# Altium PCB timer.PcbDoc (part 1 of 2)
Units mm, origin at the board's own origin, x right, y up, seen from the top; angles counter-clockwise.
Board outline 100 x 100 mm, 4 copper layers (Top Layer, Int1 (GND), Int2 (PWR), Bottom Layer), stack 1.369 mm thick; 158 components, 108 nets, 457 pads, 145 vias.
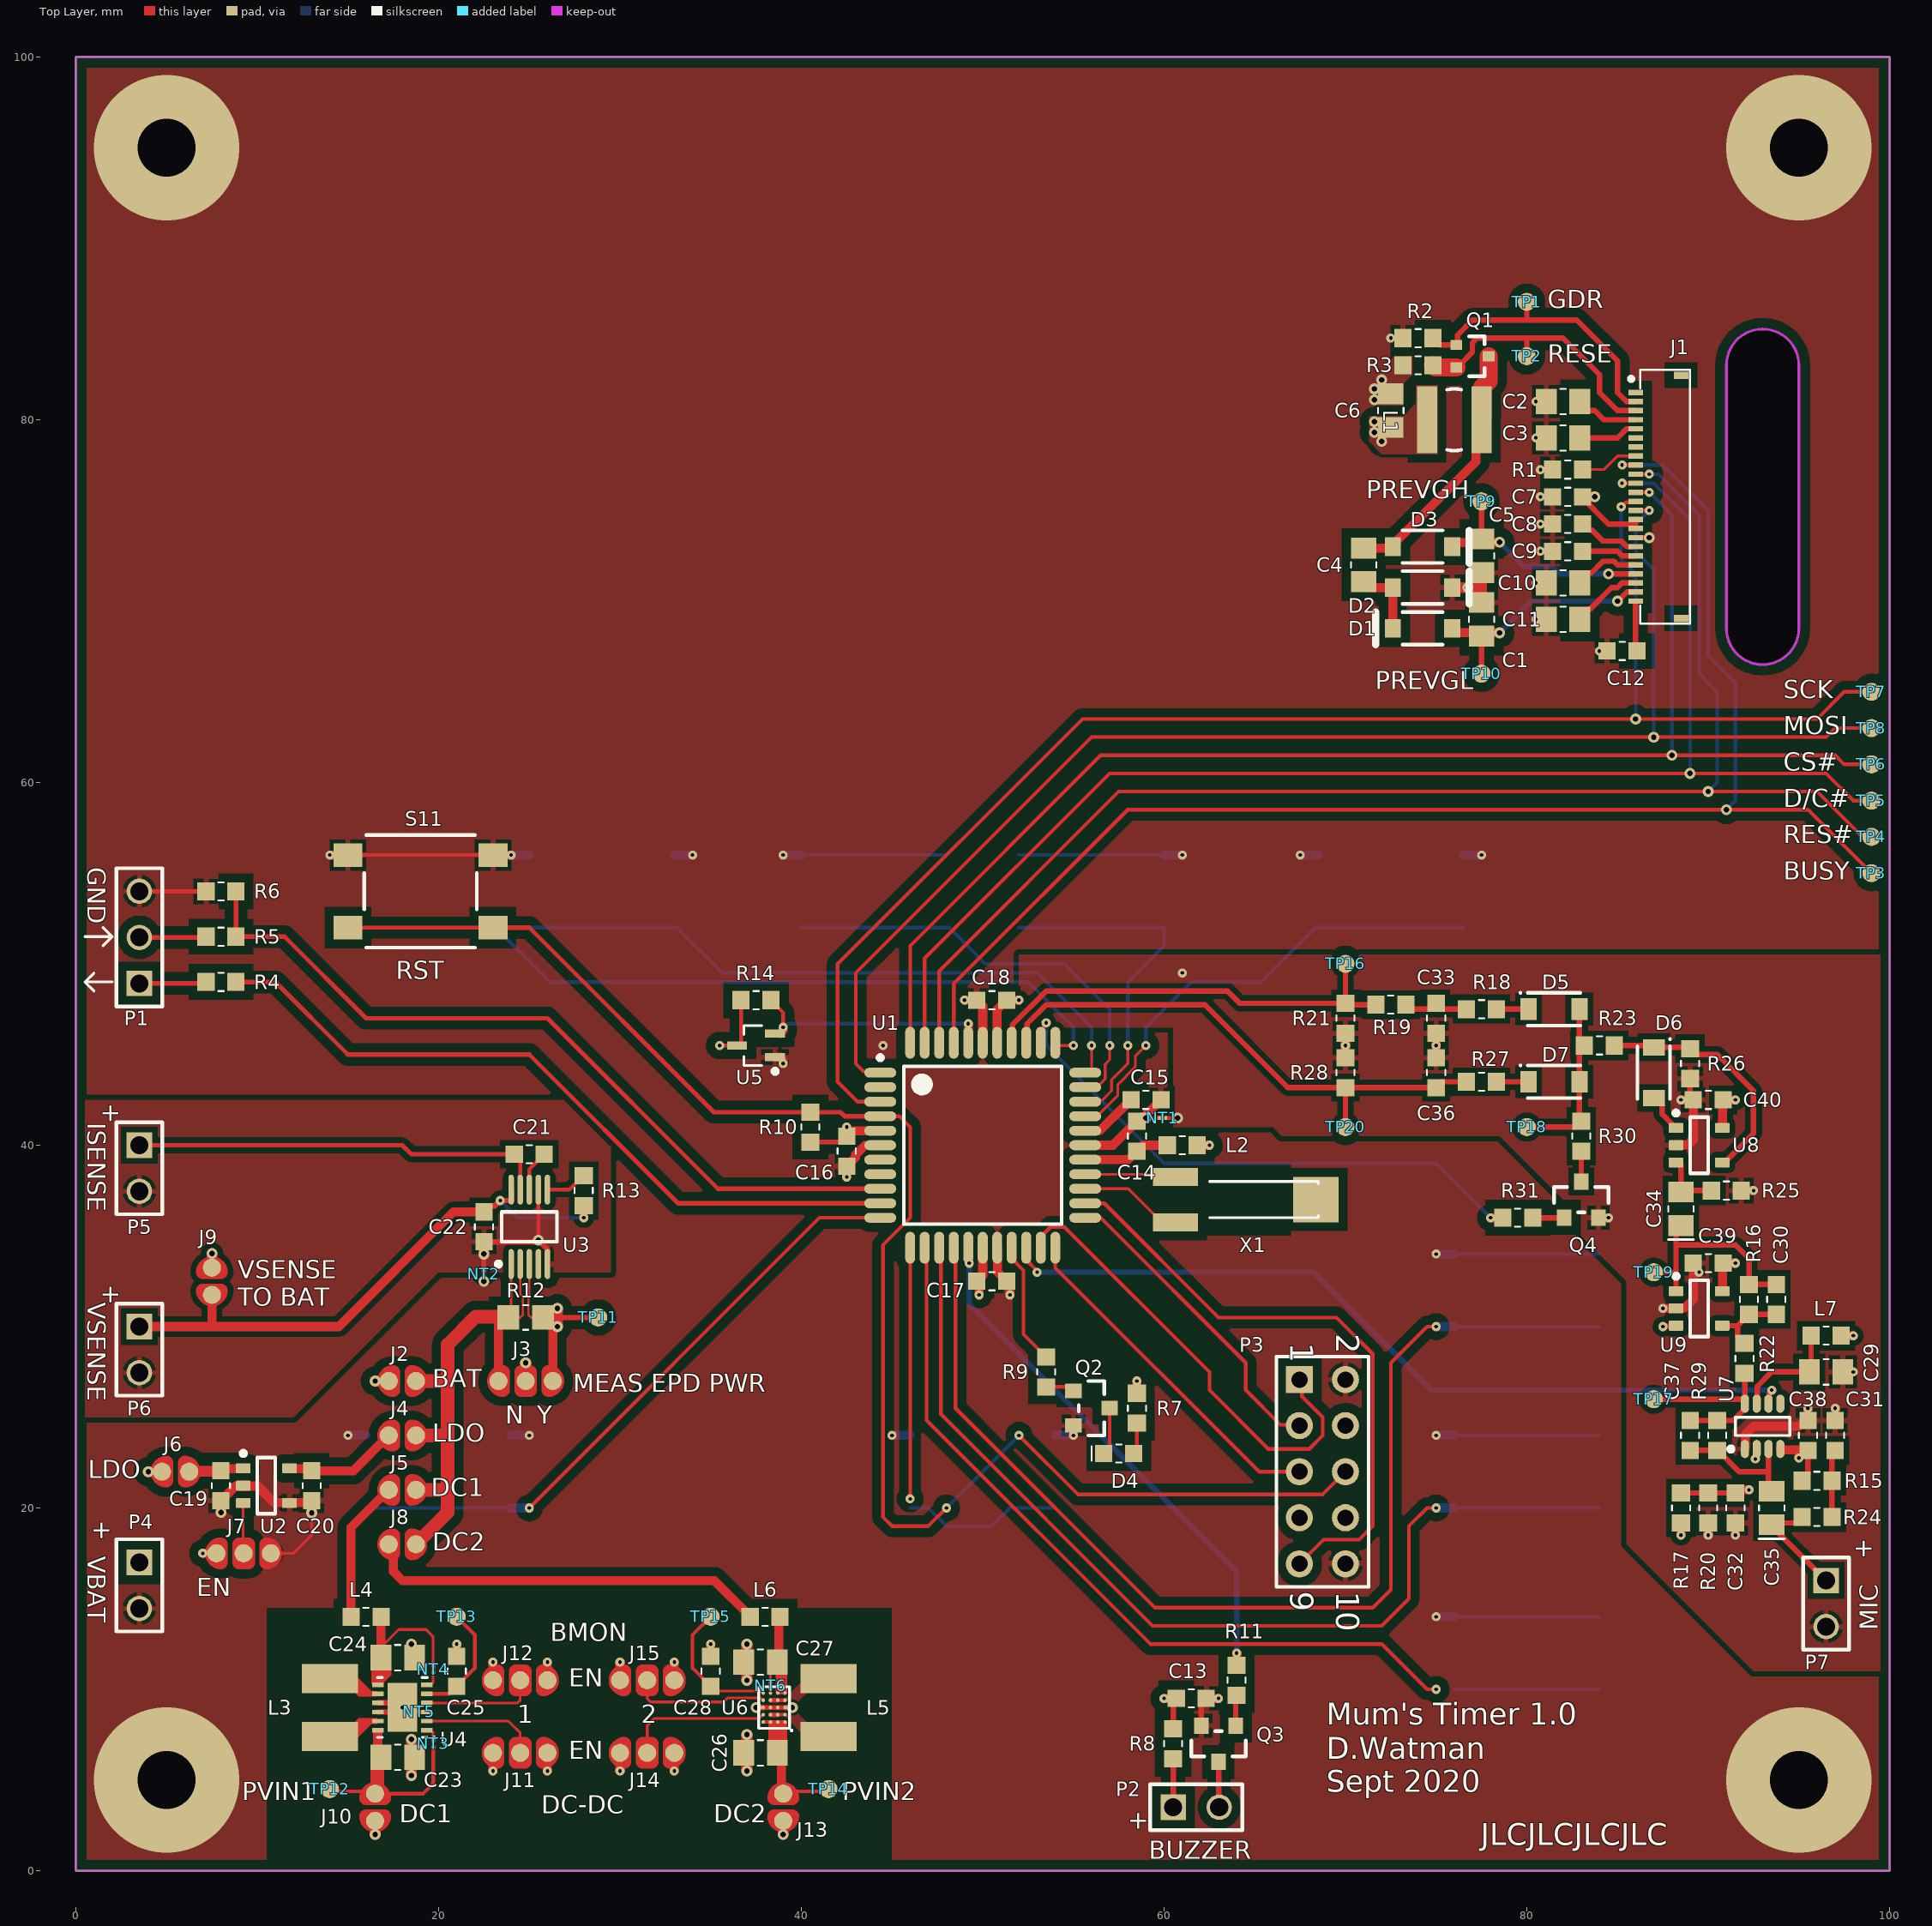
[diagram p0: Top Layer view]
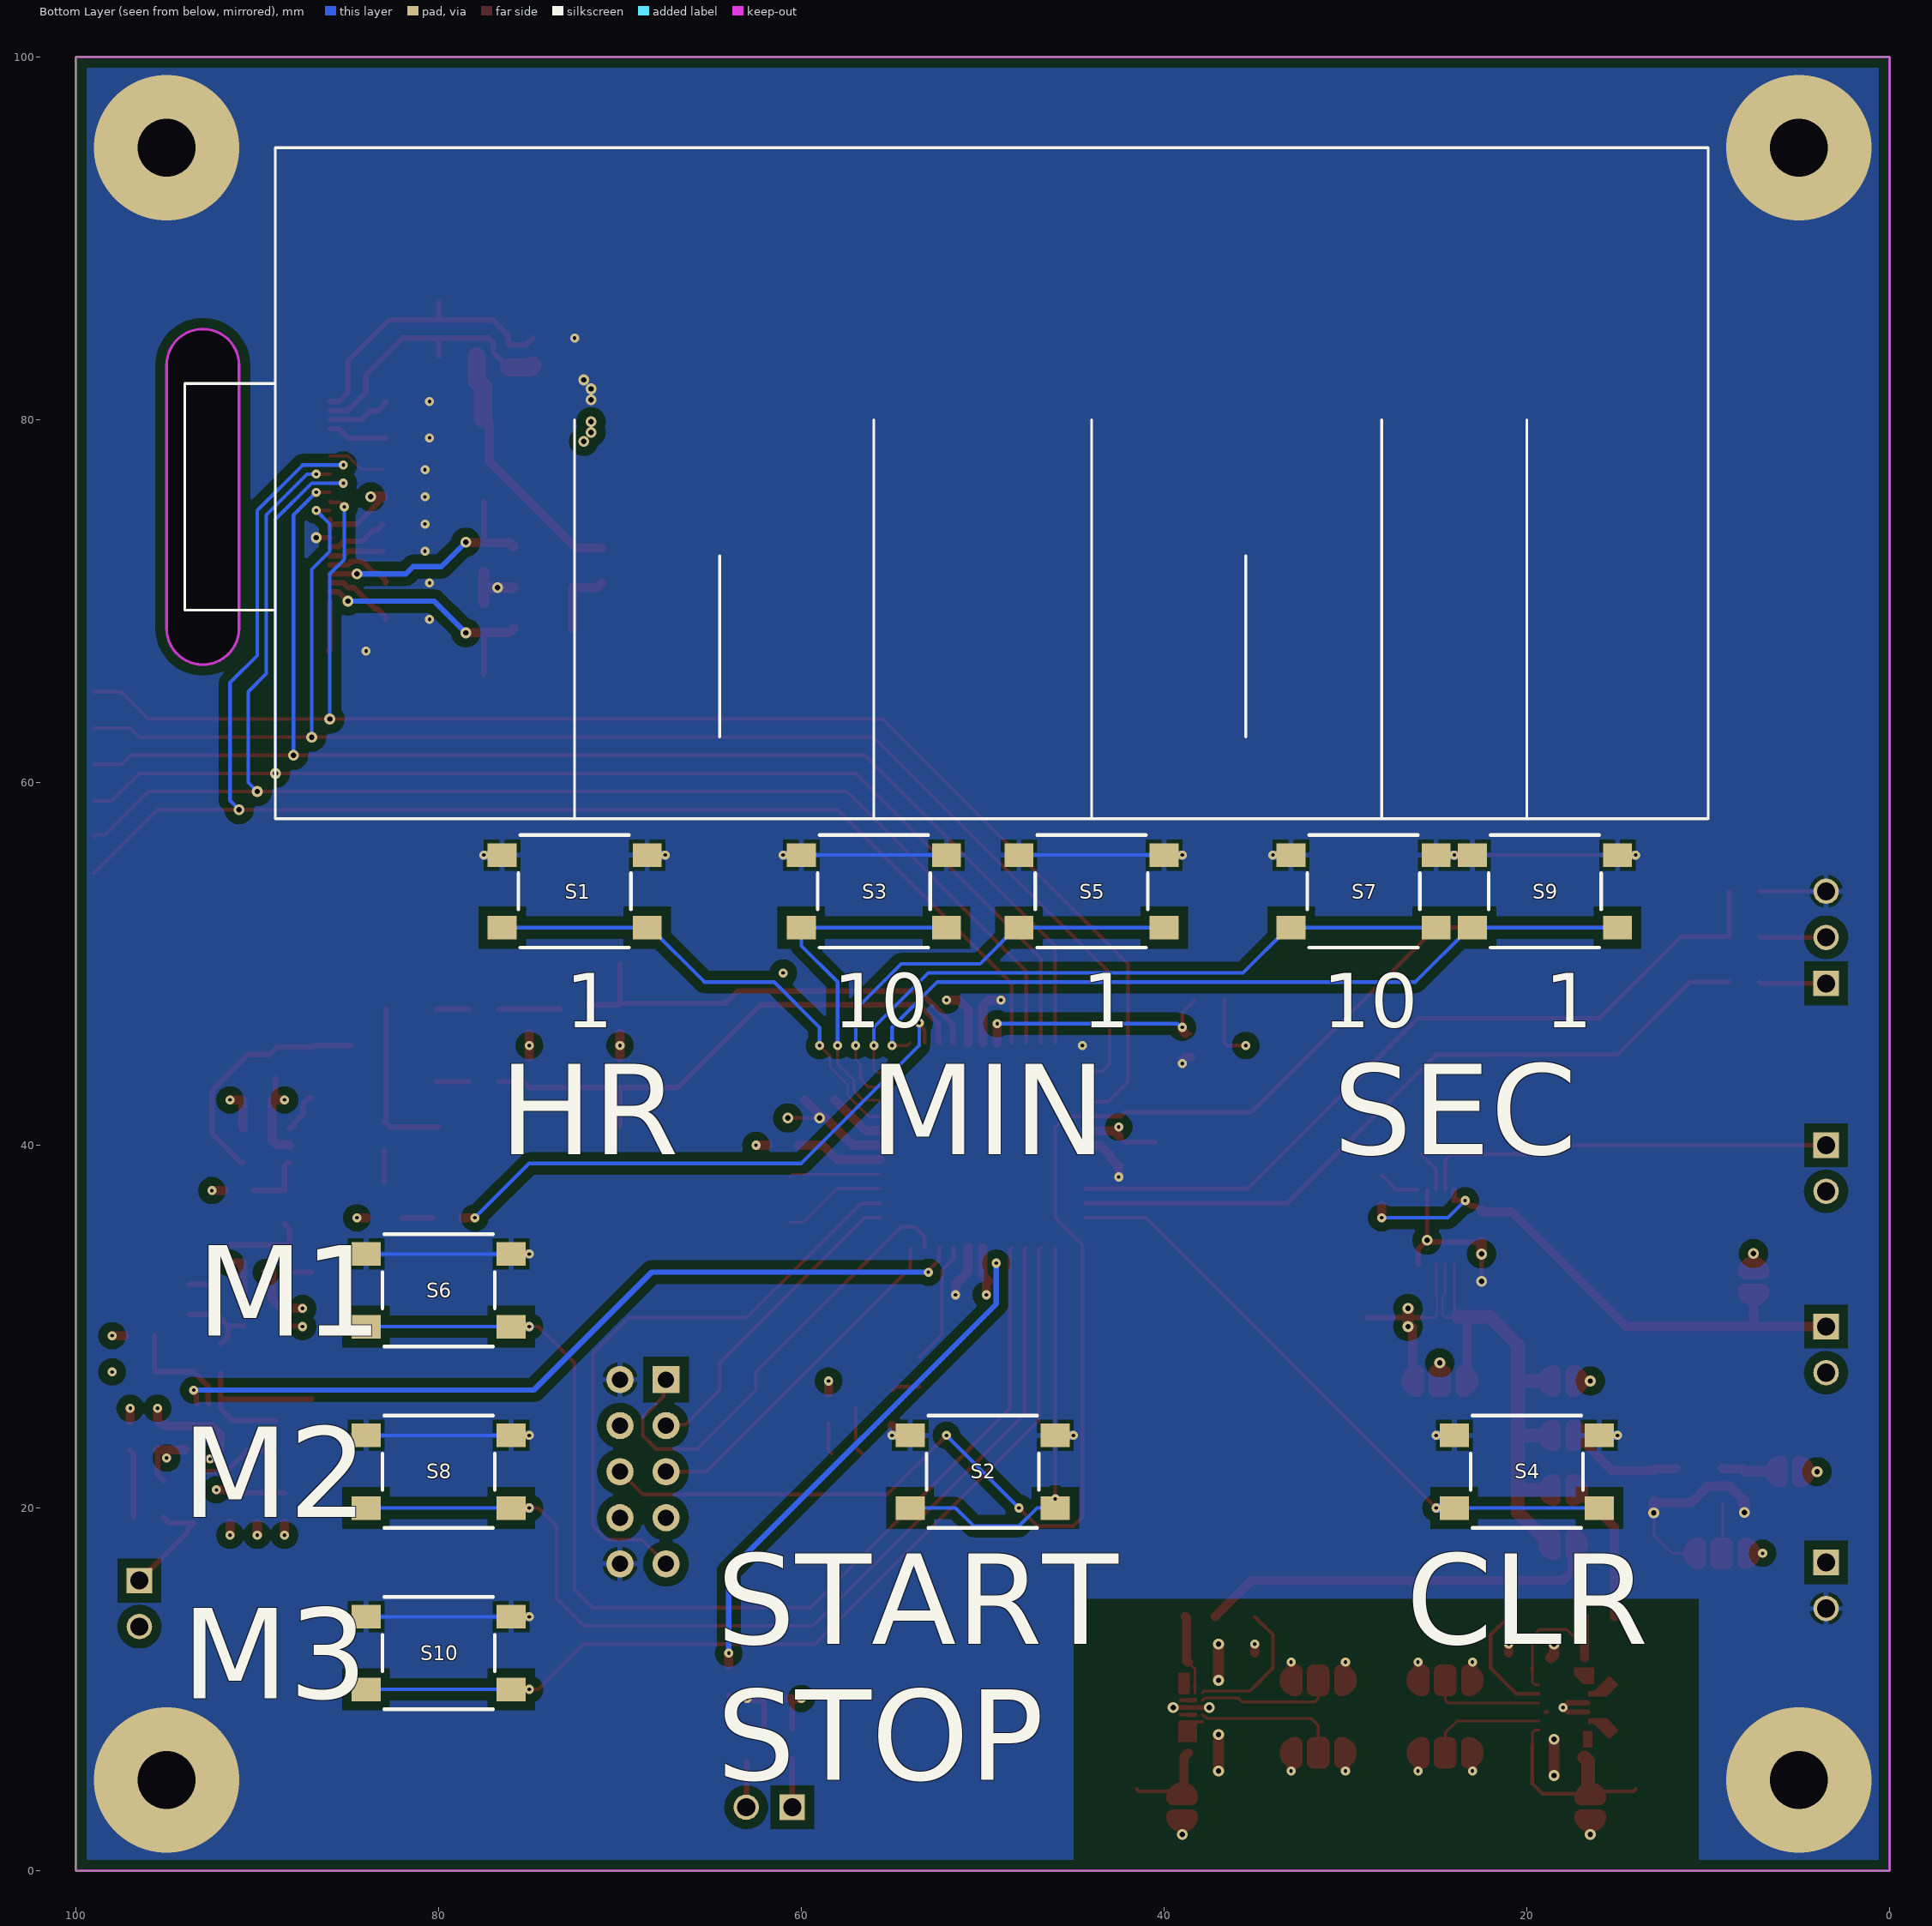
[diagram p1: Bottom Layer view, seen from below]
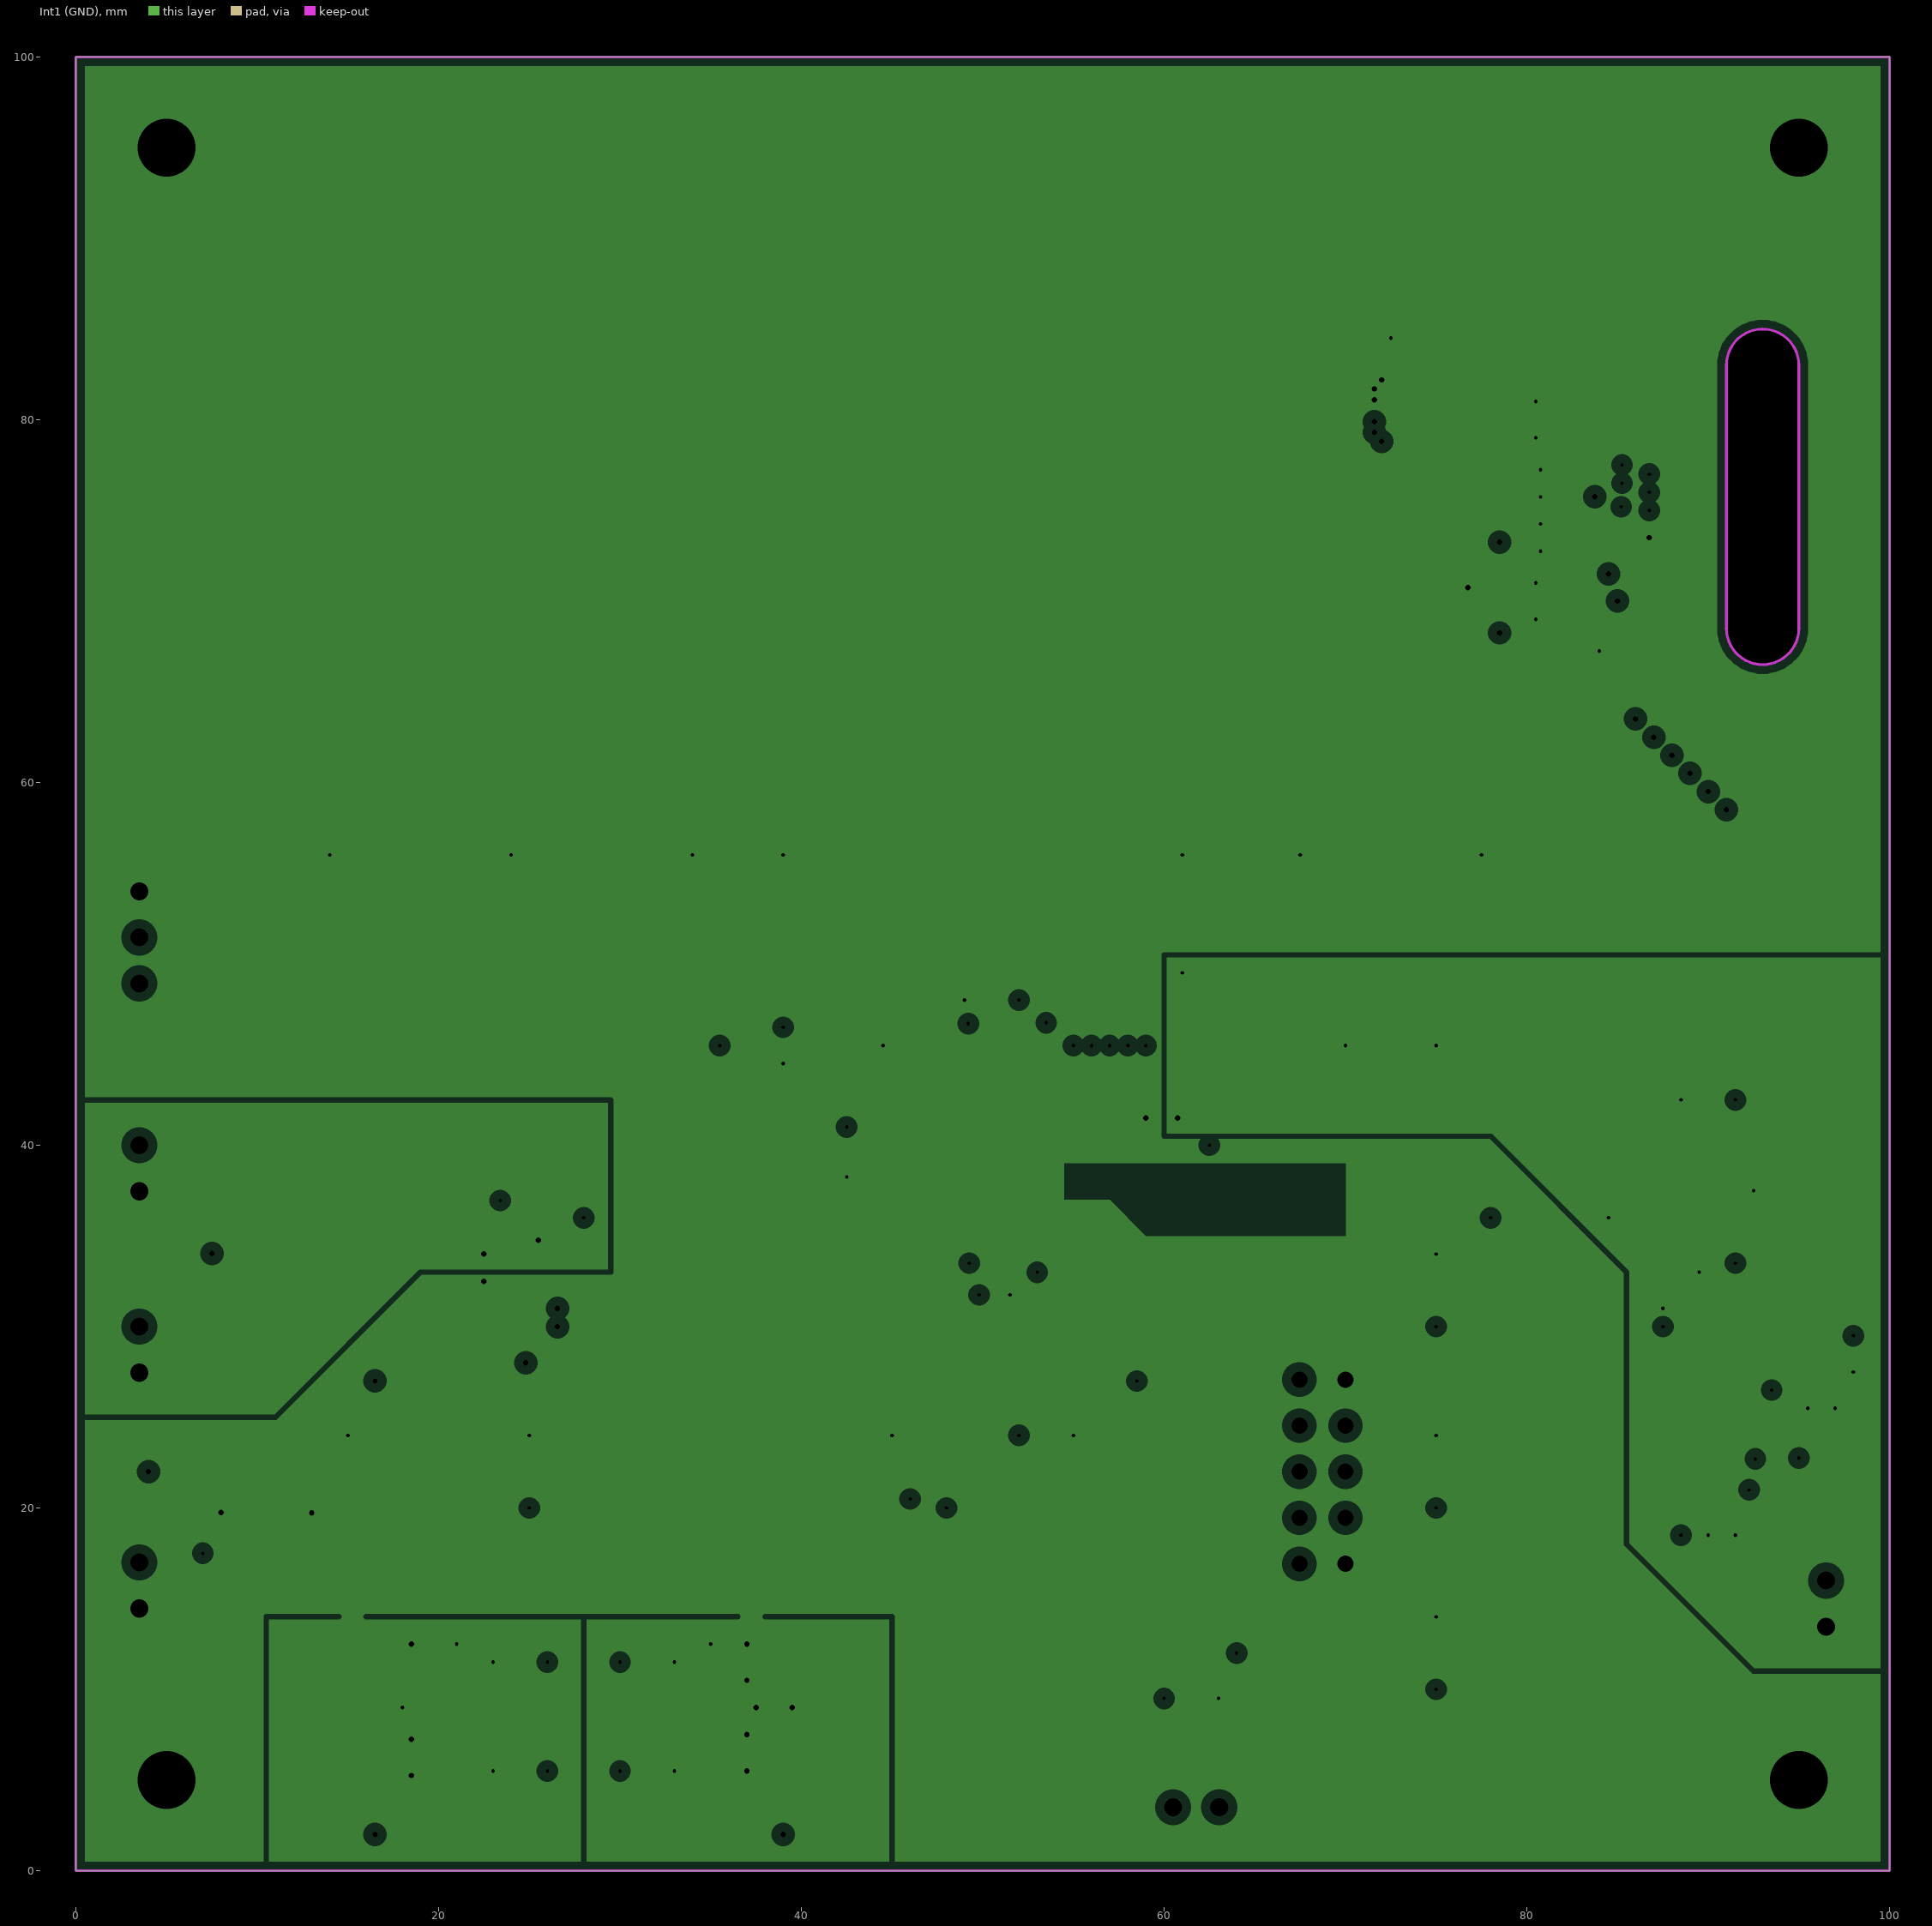
[diagram p2: Int1 (GND), clearances drawn from the general rule]
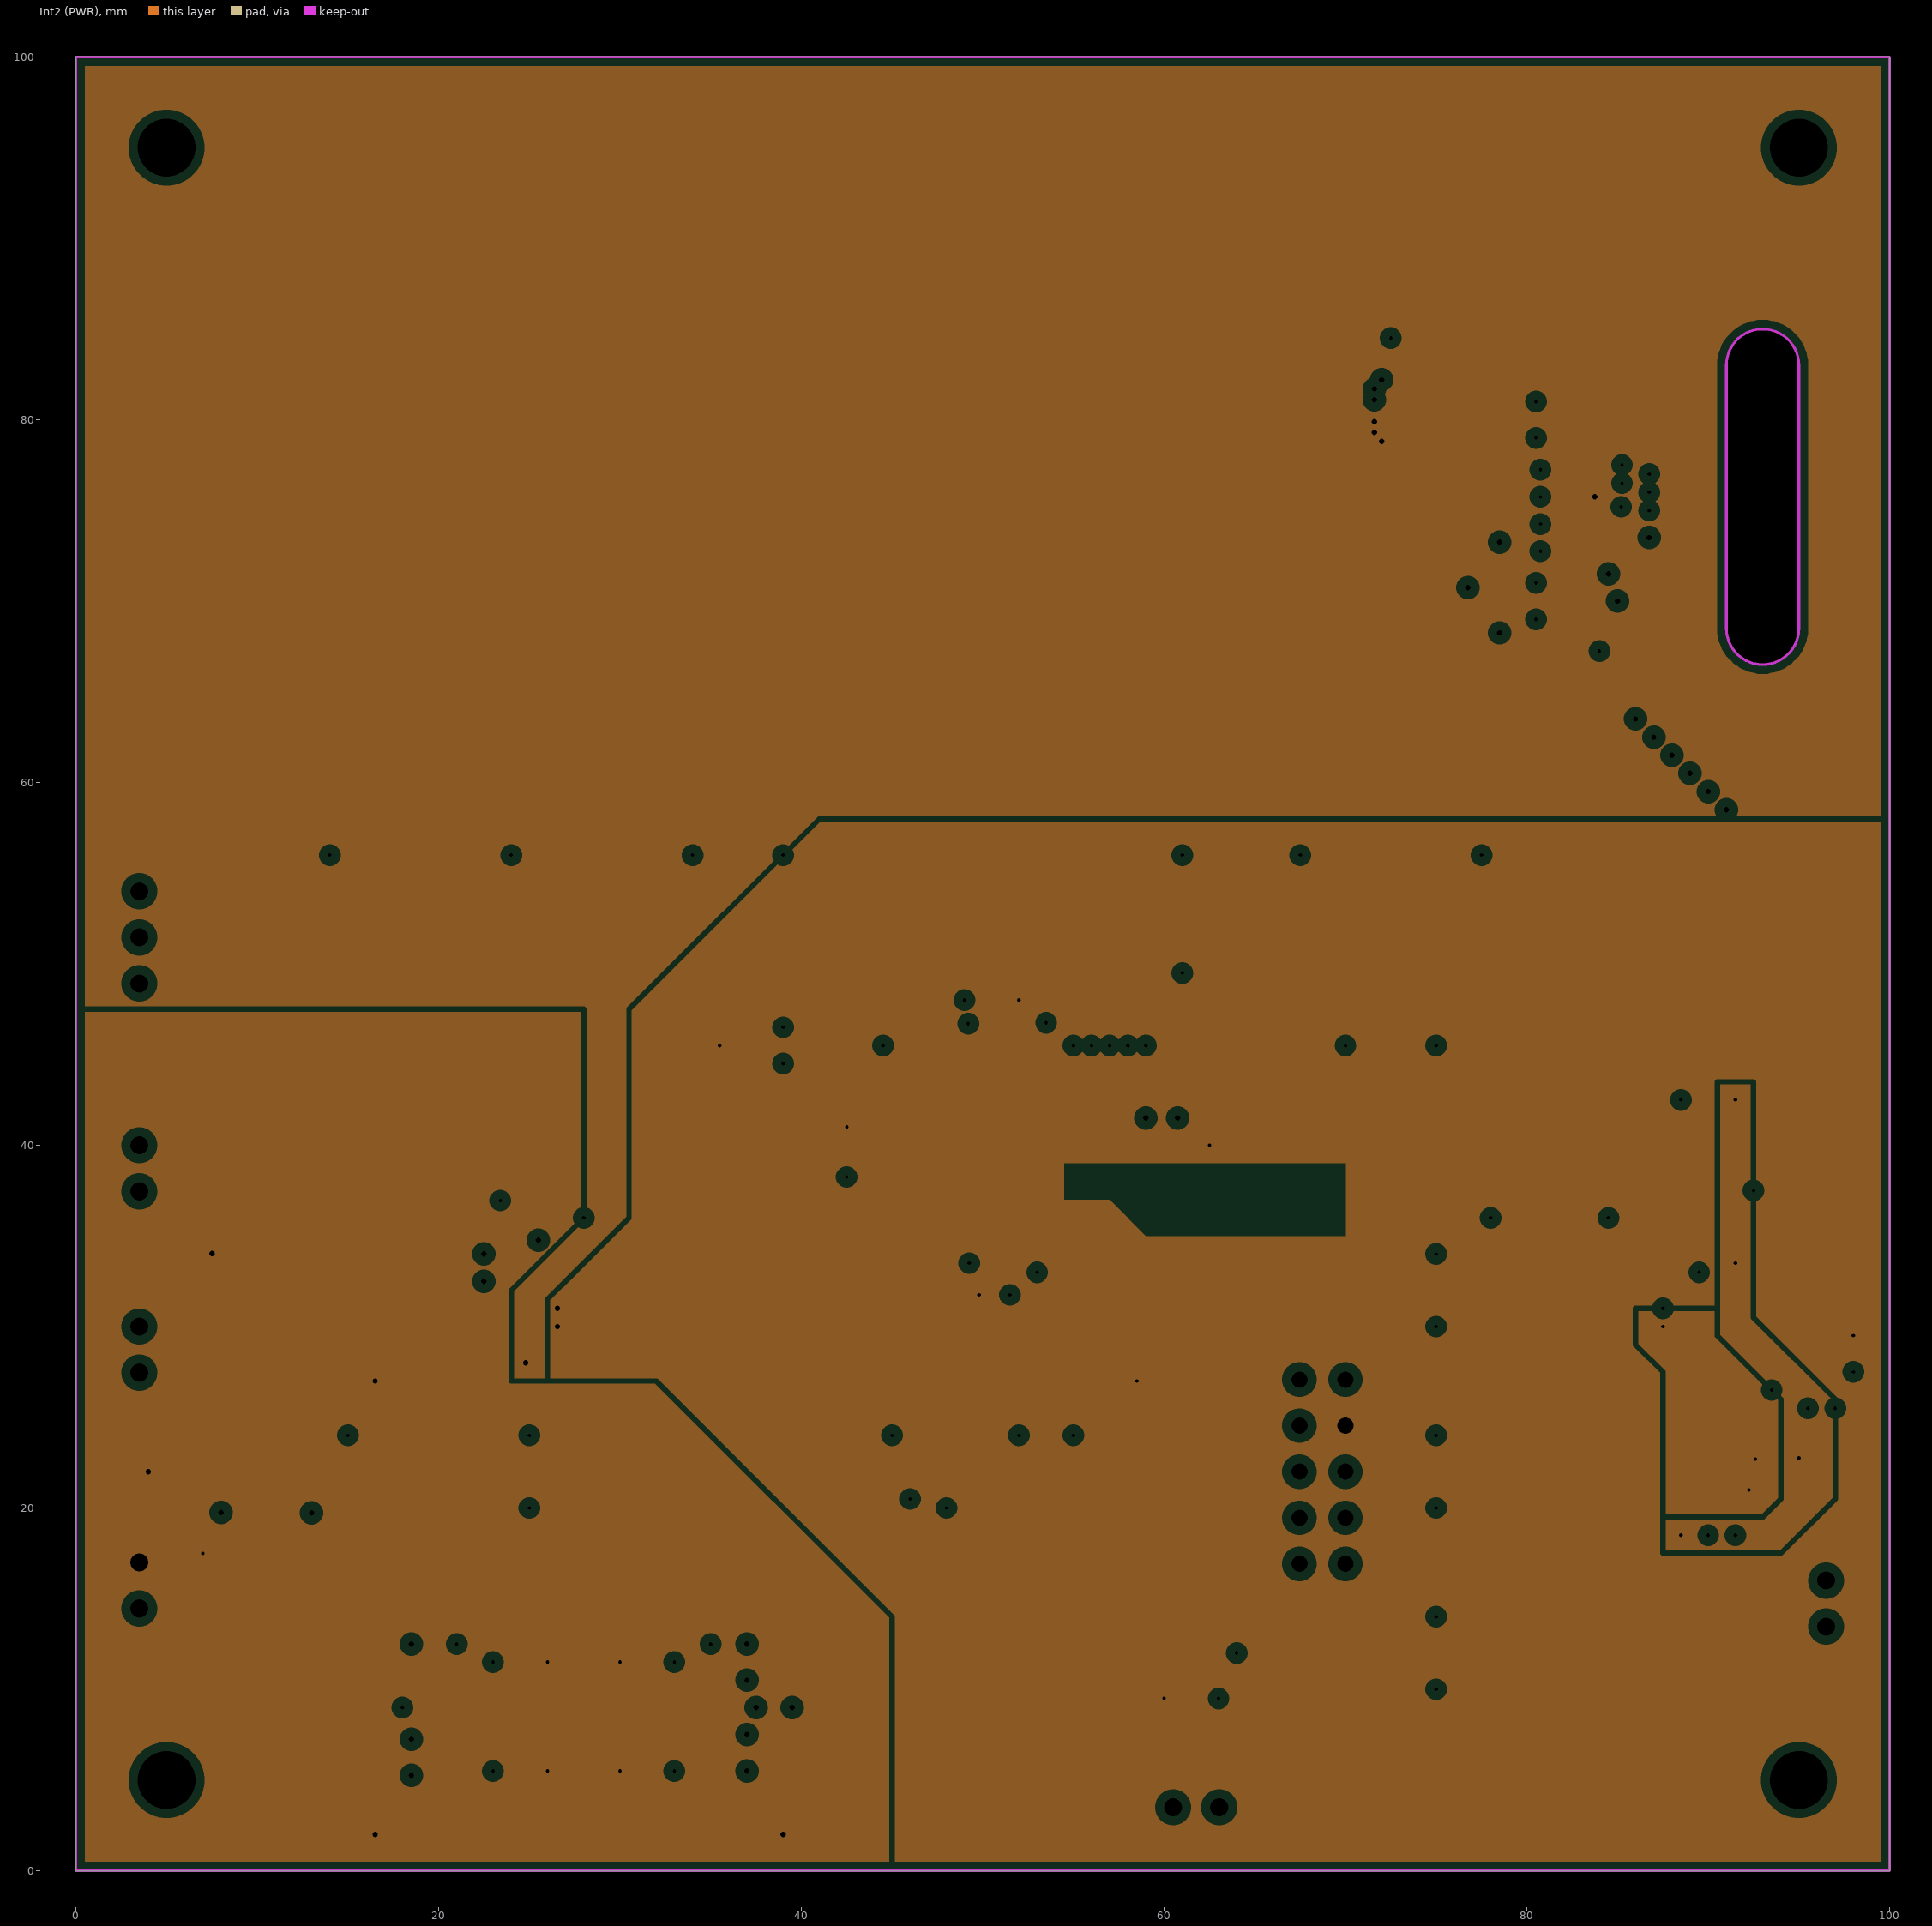
[diagram p3: Int2 (PWR), clearances drawn from the general rule]

## Layer stack, top to bottom
Top Solder: solder mask 0.0254, SM-001, Dk 4
Top Layer: signal copper 0.035
Dielectric 1: prepreg 0.1295, PP-017, Dk 4.3
Dielectric 2: prepreg 0.1295, PP-017, Dk 4.3
Int1 (GND): plane copper 0.035, net (Multiple Nets)
Dielectric 3: core 0.7112, Core-039, Dk 4.8
Int2 (PWR): plane copper 0.035, net (Multiple Nets)
Dielectric 4: prepreg 0.1295, PP-017, Dk 4.3
Dielectric 5: prepreg 0.1295, PP-017, Dk 4.3
Bottom Layer: signal copper 0.035
Bottom Solder: solder mask 0.0254, SM-001, Dk 4

## Board outline
0,0 0,100 100,100 100,0
cut-out: 91,68.5 ccw(c93,68.5) 95,68.5 95,83 ccw(c93,83) 91,83

## Design rules (kind name [scope] priority, off if disabled: settings)
AssemblyTestPointUsage [All] p1 off:
AssemblyTestpoint [All] p1 off: testpointundercomponent=TRUE minsize=1.016 maxsize=2.54 preferedsize=1.524 minholesize=0 maxholesize=1.016 preferedholesize=0.813 testpointgrid=0.025 usegrid=TRUE gridtolerance=0 allowsidetop=TRUE allowsidebottom=TRUE
Clearance Clearance_connect [InNamedPolygon('INDCON1') or InNamedPolygon('INDCON2')  or InNamedPolygon('EPD_BOOST_VCC')  or InNamedPolygon('EPD_BOOST_GND')] p1: gap=0.3 ignorepadtopadclearanceinfootprint=FALSE except(0.15: Arc-Fill Arc-Poly Arc-Region Track-Fill Track-Poly Track-Region SMDPad-Fill SMDPad-Poly SMDPad-Region THPad-Fill THPad-Poly THPad-Region Via-Fill Via-Poly Via-Region Fill-Fill Fill-Poly Fill-Region Poly-Poly Poly-Region Region-Region)
Clearance Clearance_shield [InNamedPolygon('ISENSE_AGND') or InNamedPolygon('MIC_SGND')] p2: gap=0.3 ignorepadtopadclearanceinfootprint=FALSE
Clearance Clearance_InnerLayers [OnInverted vs OnInverted] p3 off: gap=0.15 ignorepadtopadclearanceinfootprint=FALSE except(0.3: Fill-Fill Fill-Poly Fill-Region Poly-Poly Poly-Region Region-Region; 0.5: Arc-Fill Arc-Poly Arc-Region Track-Fill Track-Poly Track-Region SMDPad-Fill SMDPad-Poly SMDPad-Region THPad-Fill THPad-Poly THPad-Region Via-Fill Via-Poly Via-Region)
Clearance Clearance_fill [InNamedPolygon('TOP_GND_FILL') or InNamedPolygon('BTM_GND_FILL')] p4: gap=0.5 ignorepadtopadclearanceinfootprint=FALSE
Clearance [All] p5: gap=0.15 ignorepadtopadclearanceinfootprint=FALSE
ComponentClearance [not IsNetTieComponent vs not IsNetTieComponent] p1: gap=0.2 collisioncheckmode=3 verticalgap=0.25 showdistances=FALSE
FabricationTestPointUsage [All] p1 off: valid=0 allowmultiple=FALSE
FabricationTestpoint [All] p1 off: side=3 testpointundercomponent=TRUE minsize=1.016 maxsize=2.54 preferedsize=1.524 minholesize=0 maxholesize=1.016 preferedholesize=0.813 testpointgrid=0.025 allowsidetop=TRUE allowsidebottom=TRUE usegrid=TRUE gridtolerance=0
HoleSize [All] p1: absolutevalues=TRUE maxlimit=6.3 minlimit=0.2 maxpercent=80.000 minpercent=20.000
HoleToHoleClearance [All] p1: gap=0.25 allowstackedmicrovias=TRUE
MinimumAnnularRing [All] p1: minimumring=0.13
MinimumSolderMaskSliver [All] p1 off: minsoldermaskwidth=0.2
PlaneClearance [All] p1: clearance=0.5
PlaneConnect PlaneConnect_PWR [(InNet('GND') or InNet('AGND') or InNet('SGND') or InNet('VBAT') or InNet('VCC') or InNet('VCC_EPD'))  and (AsMM(HoleDiameter) = 0.3)] p1: pad.planeconnectstyle=Relief pad.reliefexpansion=0.3 pad.reliefentries=4 pad.reliefconductorwidth=0.3 pad.reliefairgap=0.2 via.planeconnectstyle=Direct via.reliefexpansion=0.508 via.reliefentries=4 via.reliefconductorwidth=0.254 via.reliefairgap=0.254
PlaneConnect PlaneConnect_PAD [InAnyComponent] p2: pad.planeconnectstyle=Relief pad.reliefexpansion=0.3 pad.reliefentries=4 pad.reliefconductorwidth=0.3 pad.reliefairgap=0.2 via.planeconnectstyle=Direct via.reliefexpansion=0.508 via.reliefentries=4 via.reliefconductorwidth=0.254 via.reliefairgap=0.254
PlaneConnect [All] p3: planeconnectstyle=Relief reliefexpansion=0.3 reliefentries=4 reliefconductorwidth=0.3 reliefairgap=0.2
PolygonConnect PolygonConnect_direct [All vs IsNamedPolygon('INDCON1') or IsNamedPolygon('INDCON2')  or IsNamedPolygon('EPD_BOOST_VCC')  or IsNamedPolygon('EPD_BOOST_GND')] p1: connectstyle=Direct reliefconductorwidth=0.25 reliefentries=4 polygonreliefangle="90 Angle" airgapwidth=0.2
PolygonConnect PolygonConnect_BigHoles [All vs (AsMM(HoleSize) >= 2)] p2 off: connectstyle=Direct reliefconductorwidth=0.25 reliefentries=4 polygonreliefangle="90 Angle" airgapwidth=0.2
PolygonConnect [All] p3: thpad.connectstyle=Relief thpad.reliefconductorwidth=0.3 thpad.reliefentries=4 thpad.polygonreliefangle="90 Angle" thpad.airgapwidth=0.2 smdpad.connectstyle=Relief smdpad.reliefconductorwidth=0.3 smdpad.reliefentries=4 smdpad.polygonreliefangle="90 Angle" smdpad.airgapwidth=0.2 via.connectstyle=Direct via.reliefconductorwidth=0.508 via.reliefentries=4 via.polygonreliefangle="90 Angle" via.airgapwidth=0.254
RoutingVias [All] p1: holewidth=0.3 width=0.6 viastyle="Through Hole" minholewidth=0.2 minwidth=0.45 maxholewidth=6.3 maxwidth=10
SilkToSilkClearance [All] p1 off: silktosilkclearance=0.2
SilkToSolderMaskClearance [IsPad] p1 off: minsilkscreentomaskgap=0.15 clearancetoexposedcopper=TRUE
SolderMaskExpansion [All] p1: expansion=0.05 istentingtop=FALSE
Width [All] p1: maxlimit=5 minlimit=0.127 preferedwidth=0.3
18 further rules are at their usual default settings.

## Classes and differential pairs
component class timer_mic: C13 C29 C31 C33 C35 C37 C39 D4 D6 L7 P7 Q3 R11 R16 R18 R26 R27 R28 R30 TP14 TP17 TP18 TP19 TP20 U7 U8 U9
component class timer_power: C17 C22 C26 C29 J2 J3 J4 J7 J8 J10 J12 J15 L3 L4 L6 NT3 NT5 NT6 P2 P5 R7 R8 R14 TP11 TP12 TP13 TP14 TP15 U2 U3 U4 U6
component class timer_main: C1 C2 C3 C4 C5 C6 C7 C8 C9 C10 C11 C12 C13 C14 C15 C17 D1 D2 D3 D4 J1 L1 L2 NT1 P1 Q1 Q3 R1 R2 R3 R4 R5 R7 R8 R9 R11 R14 S1 S2 S5 S6 S7 S10 S11 TP1 TP2 TP3 TP4 TP5 TP6 TP7 TP9 TP10 U1 X1

## Components (designator, comment, footprint, x,y, rotation, side; value= is the part's Value field where it differs from the comment)
C1 "CAP" C0805/2012 77.5,69 r270 top value=4.7uF
C2 "CAP" C0805/2012 82,81 r0 top value=4.7uF
C3 "CAP" C0805/2012 82,79 r0 top value=4.7uF
C4 "CAP" C0805/2012 71,72 r270 top value=4.7uF
C5 "CAP" C0805/2012 77.5,72.5 r270 top value=4.7uF
C6 "CAP" C0805/2012 72.5,80.5 r270 top value=4.7uF
C7 "CAP" C0603/1608 82.25,75.75 r0 top value=1uF
C8 "CAP" C0603/1608 82.25,74.25 r0 top value=1uF
C9 "CAP" C0603/1608 82.25,72.75 r0 top value=1uF
C10 "CAP" C0805/2012 82,71 r0 top value=4.7uF
C11 "CAP" C0805/2012 82,69 r0 top value=4.7uF
C12 "CAP" C0603/1608 85.25,67.25 r0 top value=1uF
C13 "CAP" C0603/1608 61.5,9.5 r180 top value=1uF
C14 "CAP" C0603/1608 58.5,40.5 r270 top value=1uF
C15 "CAP" C0603/1608 59,42.5 r180 top value=1uF
C16 "CAP" C0603/1608 42.5,39.675 r90 top value=1uF
C17 "CAP" C0603/1608 50.5,32.5 r180 top value=1uF
C18 "CAP" C0603/1608 50.5,48 r0 top value=1uF
C19 "CAP" C0603/1608 8,21.23 r90 top value=1uF
C20 "CAP" C0603/1608 13,21.23 r90 top value=1uF
C21 "CAP" C0603/1608 25,39.5 r180 top value=1nF
C22 "CAP" C0603/1608 22.5,35.5 r90 top value=1uF
C23 "CAP" C0805/2012 17.75,6.25 r180 top value=10uF
C24 "CAP" C0805/2012 17.75,11.75 r180 top value=22uF
C25 "CAP" C0603/1608 21,11 r270 top value=1uF
C26 "CAP" C0805/2012 37.75,6.5 r0 top value=10uF
C27 "CAP" C0805/2012 37.75,11.5 r0 top value=22uF
C28 "CAP" C0603/1608 35,11 r270 top value=1uF
C29 "CAP" C0805/2012 96.5,27.5 r180 top value=4.7uF
C30 "CAP" C0603/1608 93.75,31.5 r90 top value=47pF
C31 "CAP" C0603/1608 97,24 r270 top value=1uF
C32 "CAP" C0603/1608 91.5,20 r90 top value=1uF
C33 "CAP" C0603/1608 75,47 r90 top value=0.2uF
C34 "POLCAP" CP0805/2012 88.5,36.5 r90 top value=1uF
C35 "POLCAP" CP0805/2012 93.5,20 r90 top value=1uF
C36 "CAP" C0603/1608 75,44 r270 top value=1uF
C37 "CAP" C0603/1608 89,24 r270 top value=47pF
C38 "CAP" C0603/1608 95.5,24 r270 top value=1uF
C39 "CAP" C0603/1608 90,33.5 r0 top value=1uF
C40 "CAP" C0603/1608 90,42.5 r0 top value=1uF
D1 "MBR0530" FAIR-SOD123-2_V 74.25,68.5 r180 top
D2 "MBR0530" FAIR-SOD123-2_V 74.25,70.75 r0 top
D3 "MBR0530" FAIR-SOD123-2_V 74.25,73 r0 top
D4 "LED" 0603/1608_P 57.5,23 r180 top value=RED
D5 "DIODE_SCHOTTKY" SOD-123 81.5,47.5 r0 top value=xA
D6 "DIODE_SCHOTTKY" SOD-123 87,44 r270 top value=xA
D7 "DIODE_SCHOTTKY" SOD-123 81.5,43.5 r0 top value=xA
J1 "EPAPER_FMC" "FFC2B28-24-G REV" 86,75.75 r90 top locked
J2 "SEL2" JMP2 18,27 r0 top
J3 "SEL3" JMP3 24.8,27 r180 top
J4 "SEL2" JMP2 18,24 r0 top
J5 "SEL2" JMP2 18,21 r0 top
J6 "SEL2" JMP2 5.5,22 r0 top
J7 "SEL3" JMP3 9.25,17.5 r180 top
J8 "SEL2" JMP2 18,18 r0 top
J9 "SEL2" JMP2 7.5,32.5 r90 top
J10 "SEL2" JMP2 16.5,3.5 r90 top
J11 "SEL3" JMP3 24.5,6.5 r0 top
J12 "SEL3" JMP3 24.5,10.5 r0 top
J13 "SEL2" JMP2 39,3.5 r90 top
J14 "SEL3" JMP3 31.5,6.5 r180 top
J15 "SEL3" JMP3 31.5,10.5 r180 top
L1 "IND" IND4x4mm 76,80 r0 top value=10uH
L2 "FERRITE" R0603/1608 61,40 r0 top value="1k @ 100MHz"
L3 "IND" IND3x3mm 14,9 r90 top value=2.2uH
L4 "IND" R0603/1608 16,14 r180 top value=FERRITE
L5 "IND" IND3x3mm 41.5,9 r90 top value=2.2uH
L6 "IND" R0603/1608 38,14 r180 top value=FERRITE
L7 "FERRITE" R0603/1608 96.5,29.5 r0 top value="1k @ 100MHz"
NT1 "NET_TIE2" NT2_0.5mm 59.925,41.5 r0 top net-tie
NT2 "NET_TIE" NT2_0.5mm 22.5,32.9 r90 top net-tie
NT3 "NET_TIE" NT2_0.5mm 19.7,7 r270 top net-tie
NT4 "NET_TIE" NT2_0.5mm 19.7,11.1 r90 top net-tie
NT5 "NET_TIE" NT2_0.5mm 18.925,8.75 r0 top net-tie
NT6 "NET_TIE" NT2_0.5mm 38.3,10.2 r90 top net-tie
P1 "SIL3" PINS-3 3.5,51.46 r180 top
P2 "SIL2" PINS-2 61.77,3.5 r90 top
P3 "Header 5X2" HDR2X5 67.46,27.08 r270 top
P4 "SIL2" PINS-2 3.5,15.73 r0 top
P5 "SIL2" PINS-2 3.5,38.73 r0 top
P6 "SIL2" PINS-2 3.5,28.73 r0 top
P7 "SIL2" PINS-2 96.5,14.73 r0 top
Q1 "SI1308EDL-T1-GE3" FP-S-03946-MFG 77,83.5 r0 top
Q2 "DMG2302UK-7" FP-SOT23-MFG 56,25.5 r0 top
Q3 "DMG2302UK-7" FP-SOT23-MFG 63,7 r270 top
Q4 "DMG2302UK-7" FP-SOT23-MFG 83,37 r90 top
R1 "RES" R0603/1608 82.25,77.25 r180 top value=3R
R2 "RES" R0603/1608 74,84.5 r180 top value=10k
R3 "RES" R0603/1608 74,83 r180 top value=3R
R4 "RES" R0603/1608 8,49 r0 top value=1.8k
R5 "RES" R0603/1608 8,51.5 r0 top value=1.8k
R6 "RES" R0603/1608 8,54 r180 top value=3.3k
R7 "RES" R0603/1608 58.5,25.5 r270 top value=330R
R8 "RES" R0603/1608 60.5,7 r90 top value=33R
R9 "RES" R0603/1608 53.5,27.5 r270 top value=1k
R10 "RES" R0603/1608 40.5,41 r90 top value=10k
R11 "RES" R0603/1608 64,10.5 r90 top value=1k
R12 "RES" R0805/2012 24.8,30.5 r0 top value=2R
R13 "RES" R0603/1608 28,37.5 r270 top value=10k
R14 "RES" R0603/1608 37.5,48 r0 top value=10k
R15 "RES" R0603/1608 96,21.5 r180 top value=360R
R16 "RES" R0603/1608 92.25,31.5 r270 top value=100k
R17 "RES" R0603/1608 88.5,20 r90 top value=100k
R18 "RES" R0603/1608 77.5,47.5 r0 top value=1k
R19 "RES" R0603/1608 72.5,47.75 r0 top value=10k
R20 "RES" R0603/1608 90,20 r270 top value=100k
R21 "RES" R0603/1608 70,47 r270 top value=100k
R22 "RES" R0603/1608 92,28.25 r270 top value=10k
R23 "RES" R0603/1608 84,45.5 r0 top value=1k
R24 "RES" R0603/1608 96,19.5 r180 top value=2.2k
R25 "RES" R0603/1608 91,37.5 r0 top value=10k
R26 "RES" R0603/1608 89,44.5 r270 top value=10k
R27 "RES" R0603/1608 77.5,43.5 r0 top value=1k
R28 "RES" R0603/1608 70,44 r90 top value=100k
R29 "RES" R0603/1608 90.5,24 r90 top value=100k
R30 "RES" R0603/1608 83,40.5 r270 top value=220R
R31 "RES" R0603/1608 79.5,36 r180 top value=1k
S1 "SW" SW-PTS645-SMT 72.5,54 r0 bottom locked
S2 "SW" SW-PTS645-SMT 50,22 r0 bottom locked
S3 "SW" SW-PTS645-SMT 56,54 r0 bottom locked
S4 "SW" SW-PTS645-SMT 20,22 r0 bottom locked
S5 "SW" SW-PTS645-SMT 44,54 r0 bottom locked
S6 "SW" SW-PTS645-SMT 80,32 r0 bottom locked
S7 "SW" SW-PTS645-SMT 29,54 r0 bottom locked
S8 "SW" SW-PTS645-SMT 80,22 r0 bottom locked
S9 "SW" SW-PTS645-SMT 19,54 r0 bottom locked
S10 "SW" SW-PTS645-SMT 80,12 r0 bottom locked
S11 "SW" SW-PTS645-SMT 19,54 r0 top
TP1 "TP" TP-1.0 80,86.5 r90 top
TP2 "TP" TP-1.0 80,83.5 r90 top
TP3 "TP" TP-1.0 99,55 r90 top
TP4 "TP" TP-1.0 99,57 r90 top
TP5 "TP" TP-1.0 99,59 r90 top
TP6 "TP" TP-1.0 99,61 r90 top
TP7 "TP" TP-1.0 99,65 r90 top
TP8 "TP" TP-1.0 99,63 r90 top
TP9 "TP" TP-1.0 77.5,75.5 r90 top
TP10 "TP" TP-1.0 77.5,66 r90 top
TP11 "TP" TP-1.0 28.8,30.5 r90 top
TP12 "TP" TP-1.0 14,4.5 r270 top
TP13 "TP" TP-1.0 21,14 r270 top
TP14 "TP" TP-1.0 41.5,4.5 r270 top
TP15 "TP" TP-1.0 35,14 r270 top
TP16 "TP" TP-1.0 70,50 r90 top
TP17 "TP" TP-1.0 87,26 r0 top
TP18 "TP" TP-1.0 80,41 r90 top
TP19 "TP" TP-1.0 87,33 r90 top
TP20 "TP" TP-1.0 70,41 r90 top
U1 "ATmega644PA-AUR" 44A_N 50,40 r0 top locked
U2 "TPS78330DDCT" DDC0005A_L 10.5,21.23 r0 top
U3 "MAX9923HEUB+" MAXM-U10+2_N 25,35.5 r90 top
U4 "RP605x" DFN(PLP)2730-12 18,9 r180 top
U5 "MAX637x" SC70-3 37.5,45.5 r180 top
U6 "RP605x" WLCSP-20-P3 38.5,9 r180 top
U7 "MAX4468" SOT23-8 93,24.5 r90 top
U8 "LMV796MF/NOPB" DBV0005A_L 89.5,40 r0 top
U9 "LMV796MF/NOPB" DBV0005A_L 89.5,31 r0 top
X1 "XTAL" CMR200T 64.5,37 r0 top value=32.768kHz

## Footprints (in the part's own frame and the unit in brackets; to place one, negate y for a bottom-side part, rotate by r counter-clockwise, add the part's x,y. Pads: shape width x height; smd on the part's side, far side on the other; paste and mask are expansions set on the pad)
44A_N [mm] "Thin QFP, 44-Leads, Body 10x10mm, Pitch 0.8mm, IPC Medium Density"
  oval 1.75x0.55 smd: 1(-5.65,4) 2(-5.65,3.2) 3(-5.65,2.4) 4(-5.65,1.6) 5(-5.65,0.8) 6(-5.65,0) 7(-5.65,-0.8) 8(-5.65,-1.6) 9(-5.65,-2.4) 10(-5.65,-3.2) 11(-5.65,-4) 23(5.65,-4) 24(5.65,-3.2) 25(5.65,-2.4) 26(5.65,-1.6) 27(5.65,-0.8) 28(5.65,0) 29(5.65,0.8) 30(5.65,1.6) 31(5.65,2.4) 32(5.65,3.2) 33(5.65,4)
  oval 0.55x1.75 smd: 12(-4,-5.65) 13(-3.2,-5.65) 14(-2.4,-5.65) 15(-1.6,-5.65) 16(-0.8,-5.65) 17(0,-5.65) 18(0.8,-5.65) 19(1.6,-5.65) 20(2.4,-5.65) 21(3.2,-5.65) 22(4,-5.65) 34(4,5.65) 35(3.2,5.65) 36(2.4,5.65) 37(1.6,5.65) 38(0.8,5.65) 39(0,5.65) 40(-0.8,5.65) 41(-1.6,5.65) 42(-2.4,5.65) 43(-3.2,5.65) 44(-4,5.65)
  silkscreen extent -5.77,-4.35 4.35,4.95, body extent -5,-5 5,5, height 1.2
0603/1608_P [mm] "Chip Component, polarised, 2-Leads, Body 1.6x0.8mm, IPC Medium Density"
  rect 0.95x0.95 smd: 1(-0.825,0) 2(0.825,0)
  silkscreen extent -0.15,-0.5 1.5,0.5, body extent -0.87,-0.48 0.87,0.48, height 0.55
C0603/1608 [mm] "Chip Capacitor, 2-Leads, Body 1.6x0.8mm, IPC Medium Density"
  rect 0.95x0.95 smd: 1(-0.825,0) 2(0.825,0)
  silkscreen extent -0.15,-0.5 0.15,0.5, body extent -0.87,-0.48 0.87,0.48, height 0.55
C0805/2012 [mm] "Chip Capacitor, 2-Leads, Body 2.0x1.3mm, IPC Medium Density"
  rect 1.15x1.4 smd: 1(-0.925,0) 2(0.925,0)
  silkscreen extent -0.15,-0.7 0.15,0.7, body extent -1.1,-0.67 1.1,0.68, height 0.7
CMR200T [mm] "Citizen SMD crystal"
  rect 2.5x2.5 smd: 0(3.875,0)
  rect 2.5x1 smd: 1(-3.875,1.25) 2(-3.875,-1.25)
  silkscreen extent -2,-1 4,1, body extent -2,-1 4,1, height 2
CP0805/2012 [mm] "Chip Capacitor polarised, 2-Leads, Body 2.0x1.3mm, IPC Medium Density"
  rect 1.15x1.4 smd: 1(-0.925,0) 2(0.925,0)
  silkscreen extent -1.7,-0.7 0.15,0.7, body extent -1.1,-0.67 1.1,0.68, height 0.7
DBV0005A_L [mm] "SOT23, 5-Leads, Body 3.05x1.75mm, Pitch 0.95mm, IPC High Density"
  rrect18% 0.8x0.55 smd: 1(-1.275,0.95) 2(-1.275,0) 3(-1.275,-0.95) 4(1.275,-0.95) 5(1.275,0.95)
  silkscreen extent -1.4,-1.55 0.5,1.9, body extent -1.42,-1.46 1.42,1.46, height 1.08
DDC0005A_L [mm] "SOT23, 5-Leads, Body 3.05x1.75mm, Pitch 0.95mm, IPC High Density"
  rrect18% 0.8x0.55 smd: 1(-1.275,0.95) 2(-1.275,0) 3(-1.275,-0.95) 4(1.275,-0.95) 5(1.275,0.95)
  silkscreen extent -1.4,-1.55 0.5,1.9, body extent -0.88,-1.52 0.87,1.53, height 1.1
DFN(PLP)2730-12 [mm] "DFN, 12-Leads, Body 3.00x2.70mm, Pitch 0.50mm, Thermal Pad 2.70x1.63mm, IPC Medium Density"
  rect 1.63x2.7 smd paste-1: 0(0,0)
  rect 0.65x0.25 smd: 1(-1.35,1.25) 2(-1.35,0.75) 3(-1.35,0.25) 4(-1.35,-0.25) 5(-1.35,-0.75) 6(-1.35,-1.25) 7(1.35,-1.25) 8(1.35,-0.75) 9(1.35,-0.25) 10(1.35,0.25) 11(1.35,0.75) 12(1.35,1.25)
  silkscreen extent -1.8,-1.65 1.38,1.7, body extent -1.38,-1.53 1.38,1.53, height 0.6
FAIR-SOD123-2_V [mm] "SOD123, 2-Leads, Body 1.80x2.85mm"
  rect 0.88x1.02 smd: 1(-1.635,0) 2(1.635,0)
  silkscreen extent -1.11,-0.9 2.58,0.9, body extent -1.43,-0.9 1.42,0.9, height 1.28
"FFC2B28-24-G REV" [mm] "FFC connector, 24-pin from GCT (reversed pin order)"
  rect 0.4x0.8 smd: 0(-6.7,-2.5) 0(6.7,-2.5)
  rect 0.3x0.8 smd: 1(5.75,0) 2(5.25,0) 3(4.75,0) 4(4.25,0) 5(3.75,0) 6(3.25,0) 7(2.75,0) 8(2.25,0) 9(1.75,0) 10(1.25,0) 11(0.75,0) 12(0.25,0) 13(-0.25,0) 14(-0.75,0) 15(-1.25,0) 16(-1.75,0) 17(-2.25,0) 18(-2.75,0) 19(-3.25,0) 20(-3.75,0) 21(-4.25,0) 22(-4.75,0) 23(-5.25,0) 24(-5.75,0)
  silkscreen extent -7,-3 7,0.35, body extent -7,-3 7,-0.25, height 1
FP-S-03946-MFG [mil]
  rect 26x22 smd paste+0 mask+0: 1(-35,24.5) 2(-35,-24.5) 3(35,0)
  silkscreen extent -7,-43 27,43, body extent -52,-47 52,47, height 10
FP-SOT23-MFG [mm]
  rect 0.9x0.8 smd paste+0 mask+0: 1(-1,0.95) 2(-1,-0.95) 3(1,0)
  silkscreen extent -0.7,-1.5 0.7,1.5, body extent -1.55,-1.6 1.55,1.6, height 0.25
HDR2X5 [mm] "Connector; Header; 5x2 Position"
  rect 1.5x1.5 hole 0.9: 1(0,0)
  round 1.5 hole 0.9: 2(0,2.54) 3(2.54,0) 4(2.54,2.54) 5(5.08,0) 6(5.08,2.54) 7(7.62,0) 8(7.62,2.54) 9(10.16,0) 10(10.16,2.54)
  silkscreen extent -1.27,-1.27 11.43,3.81
IND3x3mm [mm] "Precision Wire Wound Inductor, 2-Leads, Body 3.0x3.0mm, IPC Medium Density"
  rect 1.6x3.1 smd: 1(-1.6,0) 2(1.6,0)
  body extent -1.49,-1.5 1.5,1.5, height 1.5
IND4x4mm [mm] "Inductor 4mm x 4 x 2 mm"
  rect 1.1x3.7 smd: 1(-1.5,0) 2(1.5,0)
  silkscreen extent -0.38,-1.7 0.38,1.7, body extent -1.98,-2 2,2, height 2
JMP2 [mm] "solderable jumper"
  round 1 smd paste-1: 1(-0.75,0) 2(0.75,0)
  Top Layer lines w0.75: -0.5,-0.5 cw(c-0.5,0) -0.5,0.5 -0.5,-0.5 ; 0.5,-0.5 ccw(c0.5,0) 0.5,0.5 0.5,-0.5
JMP3 [mm] "solderable jumper"
  round 1 smd paste-1: 1(-1.5,0) 2(0,0) 3(1.5,0)
  Top Layer lines w0.75: 1.25,0.5 cw(c1.25,0) 1.25,-0.5 1.25,0.5 ; 0.25,0.5 -0.25,0.5 -0.25,-0.5 0.25,-0.5 0.25,0.5 ; -1.25,0.5 ccw(c-1.25,0) -1.25,-0.5 -1.25,0.5
MAXM-U10+2_N [mm] "SOP, 10-Leads, Body 3x3mm, Pitch 0.5mm, IPC Medium Density"
  oval 1.65x0.3 smd: 1(-2.05,1) 2(-2.05,0.5) 3(-2.05,0) 4(-2.05,-0.5) 5(-2.05,-1) 6(2.05,-1) 7(2.05,-0.5) 8(2.05,0) 9(2.05,0.5) 10(2.05,1)
  silkscreen extent -2.17,-1.52 0.82,1.82, body extent -1.55,-1.55 1.55,1.55, height 1.1
NT2_0.5mm [mm]
  rect 0.15x0.2 smd paste-0.5 mask+0.102: 1(-0.175,0) 2(0.175,0)
  Top Layer region: -0.125,-0.1 0.125,-0.1 0.125,0.1 -0.125,0.1
PINS-2 [mm] "2 pins, 100mil spacing"
  rect 1.4x1.4 hole 1 paste+0: 1(0,1.27)
  round 1.4 hole 1 paste+0: 2(0,-1.27)
  silkscreen extent -1.27,-2.54 1.27,2.54
PINS-3 [mm] "3 pins, 100mil spacing"
  rect 1.4x1.4 hole 1 paste+0: 1(0,2.54)
  round 1.4 hole 1 paste+0: 2(0,0) 3(0,-2.54)
  silkscreen extent -1.27,-3.81 1.27,3.81
R0603/1608 [mm] "Chip Resistor, 2-Leads, Body 1.6x0.8mm, IPC Medium Density"
  rect 0.95x1 smd: 1(-0.825,0) 2(0.825,0)
  silkscreen extent -0.15,-0.5 0.15,0.5, body extent -0.87,-0.48 0.87,0.47, height 0.55
R0805/2012 [mm] "Chip Resistor, 2-Leads, Body 2.0x1.3mm, IPC Medium Density"
  rect 1.2x1.35 smd: 1(-0.95,0) 2(0.95,0)
  silkscreen extent -0.15,-0.67 0.15,0.67, body extent -1.1,-0.67 1.1,0.67, height 0.7
SC70-3 [mm] "SOT23, 3-Leads, Body 2.00x2.10mm, Pitch 0.65mm, IPC Medium Density"
  rect 1.1x0.45 smd: 1(-1.05,0.65) 2(-1.05,-0.65) 3(1.05,0)
  silkscreen extent -1.18,-1.1 0.67,1.55, body extent -0.67,-1.1 0.67,1.1, height 1.1
SOD-123 [mm] "Molded Diode, 2-Leads, Body 2.7x1.6mm, IPC Medium Density"
  rect 0.9x1.2 smd: 1(-1.4,0) 2(1.4,0)
  silkscreen extent -1.9,-0.9 1.45,0.95, body extent -1.42,-0.9 1.42,0.9, height 1.35
SOT23-8 [mm] "SOT23 8-Leads, Body 2.90x1.63mm, Pitch 0.65mm, IPC Medium Density"
  oval 1x0.45 smd: 1(-1.25,0.975) 2(-1.25,0.325) 3(-1.25,-0.325) 4(-1.25,-0.975) 5(1.25,-0.975) 6(1.25,-0.325) 7(1.25,0.325) 8(1.25,0.975)
  silkscreen extent -1.37,-1.5 0.5,1.87, body extent -0.9,-1.5 0.9,1.5, height 1.45
SW-PTS645-SMT [mm] "Tactile switch"
  rect 1.6x1.3 smd: 1(-4,2) 2(4,2) 3(-4,-2) 4(4,-2)
  silkscreen extent -3.1,-3.1 3.1,3.1, body extent -3,-3 3,3, height 5
TP-1.0 [mm] "1mm test point"
  round 1 smd paste-1 mask+0: 0(0,0)
WLCSP-20-P3 [mm] "BGA, 20-Leads, Body 1.71x2.32mmx0.40mm, Pitch 0.40mm"
  round 0.2 smd: A1(-0.6,0.8) A2(-0.6,0.4) A3(-0.6,0) A4(-0.6,-0.4) A5(-0.6,-0.8) B1(-0.2,0.8) B2(-0.2,0.4) B3(-0.2,0) B4(-0.2,-0.4) B5(-0.2,-0.8) C1(0.2,0.8) C2(0.2,0.4) C3(0.2,0) C4(0.2,-0.4) C5(0.2,-0.8) D1(0.6,0.8) D2(0.6,0.4) D3(0.6,0) D4(0.6,-0.4) D5(0.6,-0.8)
  silkscreen extent -1.01,-1.15 0.85,1.31, body extent -0.85,-1.16 0.86,1.16, height 0.4

## Part data
C1 C2 C3 C4 C5 C6 C7 C8 C9 C10 C11 C12: "Capacitor", Tolerance=x%, Voltage=50V, Type=X5R/X7R
C13 C14 C15 C16 C17 C18 C19 C20 C22 C25: "Capacitor", Tolerance=x%, Voltage=15V, Type=X5R/X7R
C21: "Capacitor", Tolerance=x%, Voltage=10V, Type=X5R/X7R
C23 C24 C26 C27 C28 C29 C30 C31 C32 C33 C36 C37 C38 C39 C40: "Capacitor", Tolerance=x%, Voltage=xV
  C23 C24 C26 C27 C28 C29 C31 C32 C33 C36 C38 C39 C40: Type=X5R/X7R
  C30 C37: Type=COG/NPO
C34 C35: library part CAP_POL, "Capacitor", Tolerance=x%, Voltage=6.3V, Type=TANT
D1 D2 D3: library part CMP-2000-05113-1, "Diode Schottky 30V 0.5A 2-Pin SOD-123 T/R", Capacitance @ Vr, F=-, Current - Average Rectified (Io)=500mA, Current - Reverse Leakage @ Vr=130µA@30V, Manufacturer=Fairchild, Operating Temperature - Junction=-65degC~125degC, Package / Case=SOD-123, Standard Package=1, Voltage - DC Reverse (Vr) (Max)=30V, Voltage - Forward (Vf) (Max) @ If=430mV@500mA, Category=DiscreteSemiconductorProducts, Datasheet URL=https://www.fairchildsemi.com/datasheets/MB/MBR0530.pdf, Datasheet Version="Rev. 1.1.0, 10/2014", Diode Type=Schottky, Family=Diodes,Rectifiers-Single, Manufacturer URL=https://www.fairchildsemi.com/, Mounting Type=SurfaceMount, Online Catalog=SchottkyDiode, Other Names=MBR0530CT, Packaging=CutTape(CT), Reverse Recovery Time (trr)=-, Series=-, Speed=FastRecovery=200mA(Io), Supplier Device Package=SOD-123
D5 D6 D7: "Schottky Diode", Voltage=xV
J1: "FMC connector for epaper display from Dailan Good Display", Supplier Part Number 1=2073-FFC2B28-24-GCT-ND, Supplier 1=Digi-Key
J2 J3 J4 J5 J6 J7 J8 J9 J10 J11 J12 J13 J14 J15: "solderable jumper"
L1 L3 L4 L5 L6: "Inductor"
L2 L7: library part IND, "Inductor"
NT1: "Link between nets"
NT2 NT3 NT4 NT5 NT6: library part NET_TIE2, "Link between nets"
P1: "SIL package, 3 pins"
P2 P4 P5 P6 P7: "SIL package, 2 pins"
P3: "Header, 5-Pin, Dual row", LatestRevisionDate=17-Jul-2002, LatestRevisionNote="Re-released for DXP Platform.", Publisher="Altium Limited"
Q1: library part CMP-02550-000099-1, "MOSFET N-CH 30V 1.4A SC-70-3", Continuous Drain Current=1.5A, Drain To Source Breakdown Voltage=30V, Drain To Source Resistance=0.11Ω, Gate To Source Voltage=12V, Input Capacitace At Vds="105pF @ 15V", Manufacturer=Vishay, Max Forward Diode Voltage=1.2V, Max Junction Temp=+150°C, Package=S-03946, Power Dissipation=0.4W, Pulse Drain Current=6A, Temperature="-55°C to +150°C", Temperature Range Low=-55°C, Typ Forward Diode Voltage=0.8V, Automotive=No, Category=Trans, ComponentLink2Description=Datasheet, ComponentLink2URL=http://www.vishay.com/docs/63399/si1308edl.pdf, Depletion Mode=False, Device Class L1="Discrete Semiconductors", Device Class L2=Transistors, Device Class L3=MOSFETs, Digikey Description="MOSFET N-CH 30V 1.4A SC-70-3", Drain To Source Voltage=30V, Gate Charge At Vgs="2.7nC @ 10V", Height=1.1mm, Ipc Land Pattern Name=SOT65P210X100-3, Lead Free=Yes, Manufacturer Part Number=SI1308EDL-T1-GE3, Mouser Description="MOSFET 30V 1.5A", Number Of Channels=1, Number Of N Channels=1, Octopart=https://octopart.com/si1308edl-t1-ge3-vishay-45284459, Reverse Recovery Charge=3nC, Reverse Recovery Time=8ns, RoHS=TRUE, Rthja Max=250°C/W, Temperature Range High=+150°C, Threshold Vgs Max=1.5V, Threshold Vgs Min=0.6V, Transconductance=5S, Turn Off Delay Time=8ns, Turn On Delay Time=2ns
Q2 Q3 Q4: library part CMP-12801-000001-1, "MOSFET N-CH 20V 2.8A SOT23", Continuous Drain Current=2.8A, Drain To Source Breakdown Voltage=20V, Drain To Source Resistance=61mΩ, Gate To Source Voltage=12V, Input Capacitace At Vds="130pF @ 10V", Manufacturer="Diodes Inc.", Max Forward Diode Voltage=1.2V, Max Junction Temp=+150°C, Package=SOT23, Power Dissipation=0.66W, Pulse Drain Current=12A, Temperature="-55°C to +150°C", Temperature Range Low=-55°C, Typ Forward Diode Voltage=0.7V, Automotive=Yes, Automotive Grade="Grade 0", Category=Trans, ComponentLink2Description=Datasheet, ComponentLink2URL=https://www.diodes.com/assets/Datasheets/DMG2302UK.pdf, Depletion Mode=False, Device Class L1="Discrete Semiconductors", Device Class L2=Transistors, Device Class L3=MOSFETs, Digikey Description="MOSFET N-CH 20V 2.8A SOT23", Drain To Source Voltage=20V, Footprint Url=https://www.diodes.com/assets/Package-Files/SOT23.pdf, Gate Charge At Vgs="2.8nC @ 10V", Height=1.1mm, Lead Free=Yes, Manufacturer Part Number=DMG2302UK-7, Number Of Channels=1, Number Of N Channels=1, Octopart=https://octopart.com/dmg2302uk-7-diodes+inc.-73850182, Reverse Recovery Charge=0.5nC, Reverse Recovery Time=5.3ns, RoHS=TRUE, Rthja Max=192°C/W, Standoff Height=0.013mm, Temperature Range High=+150°C, Threshold Vgs Max=1V, Threshold Vgs Min=0.3V, Turn Off Delay Time=4.2ns, Turn On Delay Time=0.6ns
R1 R2 R3 R4 R5 R6 R7 R8 R9 R10 R11 R12 R13 R14 R15 R16 R17 R18 R19 R20 R21 R22 R23 R24 R25 R26 R27 R28 R29 R30 R31: "Resistor", Tolerance=x%
S1 S2 S3 S4 S5 S6 S7 S8 S9 S10 S11: library part SW-PB, "Switch", Supplier Part Number 1=CKN9088CT-ND, Supplier 1=Digi-Key
TP1 TP2 TP3 TP4 TP5 TP6 TP7 TP8 TP9 TP10 TP11 TP12 TP13 TP14 TP15 TP16 TP17 TP18 TP19 TP20: "Test point"
U1: library part CMP-0095-00266-2, "8-bit AVR Microcontroller, 64KB Flash, 2KB EEPROM, 4KB SRAM, 44-pin TQFP, Industrial Grade (-40°C to 85°C), Reel", Code_JEDEC=MS-026-ACB, ComponentLink1Description="Manufacturer URL", ComponentLink1URL=http://www.atmel.com/, ComponentLink2Description="ATmega164A/164PA/324A/324PA/644A/644PA/1284/1284P Datasheet", ComponentLink2URL=http://www.atmel.com/dyn/resources/prod_documents/doc8272.pdf, ComponentLink3Description="ATmega164A/164PA/324A/324PA/644A/644PA/1284/1284P Summary", ComponentLink3URL=http://www.atmel.com/dyn/resources/prod_documents/8272S.pdf, DatasheetVersion="revC, Jun-2011", PackageDescription="44-Pin Plastic Thin Profile Quad Flat Pack, 10 x 10 x 1.0 mm Body, 0.8 mm Pitch (TQFP)", PackageReference=44A, PackageVersion="revC, Oct-2010", RevisionNote="DatasheetVersion & PackageVersion updated. Sch pin names updated. URLs added."
U2: library part CMP-0394-01077-2, "Single Output LDO, 150 mA, Fixed 3 V Output, 2.2 to 5.5 V Input, with Ultra-Low IQ, 5-pin SOT (DDC), -40 to 105 degC, Green (RoHS & no Sb/Br)", Manufacturer="Texas Instruments", Rating=Catalog, Accuracy(%)=3, Code_JEDEC=MO-193, ComponentLink1Description="Manufacturer URL", ComponentLink1URL=http://www.ti.com/, ComponentLink2Description=Datasheet, ComponentLink2URL=http://www.ti.com/general/docs/lit/getliterature.tsp?genericPartNumber=TPS78330&fileType=pdf, ComponentLink3Description="Package Specification", ComponentLink3URL=http://www.ti.com/litv/pdf/mpds123d, DatasheetVersion=SBVS133, Eco-Plan="Green (RoHS & no Sb/Br)", Fixed Output Options(V)=3, Iout(Max)(A)=0.15, Iq(Typ)(mA)=0.0005, Mounting Technology="Surface Mount", PackageDescription="5-Pin Plastic Small Outline, Body 2.9 x 1.6 mm, 0.95 mm Pitch", PackageReference=DDC0005A, PackageVersion=4204403-2/E, PartNumber=TPS78330DDCT, SubFamily="Single Channel LDO", Vdo(Typ)(mV)=130, Vin(Max)(V)=5.5, Vin(Min)(V)=2.2, Vout Adj(Max)(V)=3, Vout Adj(Min)(V)=3
U3: library part CMP-0252-00274-1, "Ultra-Precision, High-Side Current-Sense Amplifier with Fixed Gain, 100 V / V Gain, -40 to 85 degC, 10-Pin SOP (U10+2), Pb-Free", Bi-Dir. Curr. Sense=Yes, Code_JEDEC=MO-187, ComponentLink1Description="Manufacturer URL", ComponentLink1URL=http://www.maximintegrated.com/, ComponentLink2Description=Datasheet, ComponentLink2URL=http://datasheets.maximintegrated.com/en/ds/MAX9922-MAX9923.pdf, ComponentLink3Description="Package Specification", ComponentLink3URL=http://pdfserv.maximintegrated.com/package_dwgs/21-0061.PDF, DatasheetVersion="Rev. 1", Gain="25 V/V, 100 V/V ,250 V/V", Mounting Technology="Surface Mount", PackageDescription="10-Pin Micro-MAX, Thin Shrink Small-Outline (U10+2), Body 3 x 3 mm, Pitch 0.5 mm", PackageReference=U10+2, PackageVersion="Rev. L, 07/2008", PartNumber=MAX9923HEUB+
U4: library part RP605xK, "300mA Ultra-low Power Buck Boost DC/DC Converter with Battery Monitor, DFN-12 package"
U5: "Ultra-Low-Power Voltage Detector"
U6: library part RP605xZ, "300mA Ultra-low Power Buck Boost DC/DC Converter with Battery Monitor, WLCSP-20 package"
U7: "Low-Cost, Micropower, SOT23-8, Microphone / Preamplifier with Complete Shutdown"
U8 U9: library part CMP-0055-01076-3, "17 MHz, Low Noise, CMOS Input, 1.8V Operational Amplifiers, 5-pin SOT-23, Pb-Free", Manufacturer="Texas Instruments", Package Reference=DBV0005A, PackageTopMarking=AT3A*XTT, PowerWise=Y, ComponentLink1Description="Datasheet URL", ComponentLink1URL=http://www.ti.com/general/docs/lit/getliterature.tsp?genericPartNumber=LMV796&fileType=pdf, CompType=Amplifiers, PackageDescription="Molded SOT-23, .115 x .063 x .040 in Body, 5 Lead, .0375 in Pitch", PinCount=5, RoHS=Y
X1: "Crystal"

## Via types
v1: diameter 0.5, hole 0.2, Top Layer to Bottom Layer, tented both sides, 98 vias
v2: diameter 0.6, hole 0.3, Top Layer to Bottom Layer, tented both sides, 41 vias
v3: diameter 8, hole 3.2, Top Layer to Bottom Layer, 4 vias
v4: diameter 0.6, hole 0.3, Top Layer to Bottom Layer, 2 vias

## Nets (pads, with @x,y where several pads share a name; then routed paths per layer and width w, separated by ;. In a path a pad name is that pad's centre, name@x,y a point inside that pad or via, vN(x,y) a via of type N, cw(c..) or ccw(c..) an arc to the next point about the centre after c; other vN are vias at no path point)
AGND: C22.1 NT2.2 P5.2 P6.2 U3.5 U3.7 | length 9
  Top Layer w0.2: U3.7@25.5,37.55 v2(25.5,34.761) v2@25.586,34.675
  Top Layer w0.25: NT2.2@22.5,33.075 v2(22.5,34)
  Top Layer w0.3: C22.1@22.5,34.675 25.586,34.675 26,34.261 U3.5@26,33.45
  Top Layer w0.6: v2(22.5,34) C22.1@22.5,34.675
BM1: C25.2 TP13.0 U4.5 | length 6.5
  Top Layer w0.2: U4.5@19.35,9.75 20.575,9.75 C25.2@21,10.175 22,11.175 22,13 TP13.0@21,14
BM2: C28.2 TP15.0 U6.D5 | length 7.7
  Top Layer w0.15: C28.2@35,10.175 35.275,9.9 37.787,9.9 37.887,9.8 U6.D5@37.9,9.8
  Top Layer w0.2: C28.2@35,10.175 34,11.175 34,13 TP15.0@35,14
BS1: J1.8 R1.1 | length 3.2
  Top Layer w0.15: R1.1@83.075,77.25 84.25,77.25 85,78 J1.8@86,78
BTN_CLR: S4.1 S4.2 U1.11 | length 35
  Top Layer w0.2: v1(25,20) 41,36 U1.11@44.35,36
  Bottom Layer w0.2: S4.1@16,20 S4.2@24,20
  Bottom Layer w0.5: S4.2@24,20 v1(25,20)
BTN_HR: S1.1 S1.2 U1.30 | length 26.4
  Top Layer w0.15: U1.30@55.65,41.6 56.3,41.6 57.453,42.753 57.453,43.353 58.412,44.312 58.412,44.912 v1(59,45.5)
  Bottom Layer w0.2: v1(59,45.5) 59,46.5 61.5,49 65.35,49 68.35,52 S1.1@68.5,52 S1.2@76.5,52
BTN_MEM1: S6.1 S6.2 U1.15 | length 62.7
  Top Layer w0.2: U1.15@48.4,34.35 48.5,34.25 48.5,25.5 59.5,14.5 71.5,14.5 72.5,15.5 72.5,28 74.5,30 v1(75,30)
  Bottom Layer w0.2: S6.1@76,30 S6.2@84,30
  Bottom Layer w0.5: v1(75,30) S6.1@76,30
BTN_MEM2: S8.1 S8.2 U1.14 | length 55.4
  Top Layer w0.2: U1.14@47.6,34.35 47.7,34.25 47.7,25.169 59.369,13.5 72,13.5 73.5,15 73.5,19 74.5,20 v1(75,20)
  Bottom Layer w0.2: S8.1@76,20 S8.2@84,20
  Bottom Layer w0.5: v1(75,20) S8.1@76,20
BTN_MEM3: S10.1 S10.2 U1.13 | length 51.8
  Top Layer w0.2: U1.13@46.8,34.35 46.9,34.25 46.9,24.837 59.237,12.5 72,12.5 74.5,10 v1(75,10)
  Bottom Layer w0.2: S10.1@76,10 S10.2@84,10
BTN_MIN01: S5.1 S5.2 U1.32 | length 24.1
  Top Layer w0.15: U1.32@55.65,43.2 56.3,43.2 56.75,43.65 56.75,44.461 57,44.711 v1(57,45.5)
  Bottom Layer w0.2: S5.1@40,52 S5.2@48,52 48.15,52 50.15,50 54.5,50 57,47.5 v1(57,45.5)
BTN_MIN10: S3.1 S3.2 U1.31 | length 19.9
  Top Layer w0.15: U1.31@55.65,42.4 55.727,42.477 56.577,42.477 57.1,43 57.1,43.6 58,44.5 v1(58,45.5)
  Bottom Layer w0.2: S3.1@52,52 S3.2@60,52 60,51 58,49 v1(58,45.5)
BTN_SEC01: S9.1 S9.2 U1.34 | length 44.3
  Top Layer w0.15: U1.34@54,45.65 54.15,45.5 v1(55,45.5)
  Bottom Layer w0.2: S9.1@15,52 S9.2@23,52 23.15,52 26.15,49 52.5,49 55,46.5 v1(55,45.5)
BTN_SEC10: S7.1 S7.2 U1.33 | length 36
  Top Layer w0.15: U1.33@55.65,44 55.815,44 56,44.185 v1(56,45.5)
  Bottom Layer w0.2: S7.1@25,52 S7.2@33,52 33.15,52 35.65,49.5 53,49.5 56,46.5 v1(56,45.5)
BTN_START: S2.1 S2.2 U1.12 | length 22.7
  Top Layer w0.2: v1(46,20.5) U1.12@46,34.35
  Bottom Layer w0.2: S2.1@46,20 47,20 48,19 50.5,19 51.5,20 S2.2@54,20
BUSY: J1.9 TP3.0 U1.41 | length 83.1
  Top Layer w0.2: U1.41@48.4,45.65 48.4,48.9 58,58.5 v2(91,58.5) 95.5,58.5 TP3.0@99,55 ; v1(85.25,77.5) J1.9@86,77.5
  Bottom Layer w0.2: v1(85.25,77.5) 87.5,77.5 90,75 90,67 91.5,65.5 91.5,59 v2(91,58.5)
BUZ_O: P2.1 R8.1 | length 2.7
  Top Layer w0.3: P2.1@60.5,3.5 R8.1@60.5,6.175
BUZZER: R11.2 U1.16 | length 28.3
  Top Layer w0.5: R11.2@64,11.325 v1(64,12)
  Bottom Layer w0.3: v1(49.25,33.5) 49.25,31.25 64,16.5 v1(64,12)
CS#: J1.12 TP6.0 U1.44 | length 78.7
  Top Layer w0.2: U1.44@46,45.65 46,51 56.5,61.5 v2(88,61.5) 97,61.5 97.5,61 TP6.0@99,61 ; J1.12@86,76 v1(86.75,76)
  Bottom Layer w0.2: v1(86.75,76) 88,74.75 88,65.75 v2(88,61.5)
D/C#: J1.11 TP5.0 U1.43 | length 81
  Top Layer w0.2: U1.43@46.8,45.65 46.8,50.3 57,60.5 v2(89,60.5) 96.5,60.5 98,59 TP5.0@99,59 ; v1(85.25,76.5) J1.11@86,76.5
  Bottom Layer w0.2: v1(85.25,76.5) 87,76.5 89,74.5 v2(89,60.5)
EN0: J7.2 U2.3 | length 2
  Top Layer w0.15: 9.225,18.33 U2.3@9.225,20.28
EN1: J11.2 U4.2 | length 6.5
  Top Layer w0.15: U4.2@19.35,8.25 23.85,8.25 24.5,7.6 J11.2@24.5,6.5
EN2: J14.2 U6.D2 | length 7.8
  Top Layer w0.15: 31.25,7 31.5,7.25 31.5,8 31.9,8.4 37.64,8.4 37.765,8.525 37.811,8.525 37.886,8.6 U6.D2@37.9,8.6
ENBM1: J12.2 U4.4 | length 6.3
  Top Layer w0.15: U4.4@19.35,9.25 24.35,9.25 24.5,9.4 J12.2@24.5,10
  Top Layer w0.2: J12.2@24.5,10 J12.2@24.5,10.5
ENBM2: J15.2 U6.D4 | length 7.7
  Top Layer w0.15: J15.2@31.25,10.5 31.5,10.25 31.5,9.5 31.7,9.3 35.7,9.3 35.925,9.525 37.717,9.525 37.767,9.475 37.811,9.475 37.886,9.4 U6.D4@37.9,9.4
GDR: J1.2 Q1.1 R2.1 TP1.0 | length 16.1
  Top Layer w0.3: R2.1@74.825,84.5 74.825,84.475 75.15,84.15 75.175,84.15 75.203,84.122 Q1.1@76.111,84.122 76.176,84.187 76.176,84.676 77,85.5 81,85.5 82.75,85.5 85,83.25 85,81.5 85.5,81 J1.2@86,81 ; 80,85.5 TP1.0@80,86.5